# EAGLE board CT_schematic (EAGLE 7.6.0)

Size 100 x 80 mm. Coordinates in mm from the lower left corner, seen from the top.
Outline: 0,0 100,0 100,80 0,80 0,0
Copper layers (1*16): Top 0.035mm / dielectric 1.5mm / Bottom 0.035mm
Design rules "default": minimum track width 10mil, minimum drill 24mil, track to track 8mil, track to pad 8mil, pad to pad 8mil, via to via 8mil, smd to smd 8mil, copper to edge 40mil, drill to drill 8mil, minimum pad ring 10mil, minimum via ring 8mil, stop-mask expansion 4mil, vias tented up to drill 0mil, thermal gap 10mil

## Footprints (pad centres in the part's own frame; a part is rotated, then mirrored left to right if it is on the bottom)
C0603 = smd 0.8 x 0.8: 1 -0.762,0; 2 0.762,0
C0402 = smd 0.5 x 0.5: 1 -0.508,0; 2 0.508,0
C0805 = smd 1.2 x 1.3: 1 -1.016,0; 2 1.016,0
C1210 = smd 1.2 x 2.5: 1 -1.524,0; 2 1.524,0
EXV-9H = smd 3.505 x 1.676: 1 -2.857,0; 2 2.857,0
L0603 = smd 0.8 x 0.8: 1 -0.762,0; 2 0.762,0
PJ-037B_PACKAGE = drill 3.7 square: 1 12,0 | drill 3.2 square: 2 6,0
R0603 = smd 0.8 x 0.8: 1 -0.762,0; 2 0.762,0
WLCSP180 = smd 0.225 x 0.225: A1 -2.4,2.6; A2 -2,2.6; A3 -1.6,2.6; A4 -1.2,2.6; A5 -0.8,2.6; A6 -0.4,2.6; A7 0,2.6; A8 0.4,2.6; A9 0.8,2.6; A10 1.2,2.6; A11 1.6,2.6; A12 2,2.6; A13 2.4,2.6; B1 -2.4,2.2; B2 -2,2.2; B3 -1.6,2.2; B4 -1.2,2.2; B5 -0.8,2.2; B6 -0.4,2.2; B7 0,2.2; B8 0.4,2.2; B9 0.8,2.2; B10 1.2,2.2; B11 1.6,2.2; B12 2,2.2; B13 2.4,2.2; C1 -2.4,1.8; C2 -2,1.8; C3 -1.6,1.8; C4 -1.2,1.8; C5 -0.8,1.8; C6 -0.4,1.8; C7 0,1.8; C8 0.4,1.8; C9 0.8,1.8; C10 1.2,1.8; C11 1.6,1.8; C12 2,1.8; C13 2.4,1.8; D1 -2.4,1.4; D2 -2,1.4; D3 -1.6,1.4; D4 -1.2,1.4; D5 -0.8,1.4; D6 -0.4,1.4; D7 0,1.4; D8 0.4,1.4; D9 0.8,1.4; D10 1.2,1.4; D11 1.6,1.4; D12 2,1.4; D13 2.4,1.4; E1 -2.4,1; E2 -2,1; E3 -1.6,1; E4 -1.2,1; E5 -0.8,1; E6 -0.4,1; E7 0,1; E8 0.4,1; E9 0.8,1; E10 1.2,1; E11 1.6,1; E12 2,1; E13 2.4,1; F1 -2.4,0.6; F2 -2,0.6; F3 -1.6,0.6; F4 -1.2,0.6; F5 -0.8,0.6; F6 -0.4,0.6; F7 0,0.6; F8 0.4,0.6; F9 0.8,0.6; F10 1.2,0.6; F11 1.6,0.6; F12 2,0.6; F13 2.4,0.6; G1 -2.4,0.2; G2 -2,0.2; G3 -1.6,0.2; G4 -1.2,0.2; G5 -0.8,0.2; G6 -0.4,0.2; G8 0.4,0.2; G9 0.8,0.2; G10 1.2,0.2; G11 1.6,0.2; G12 2,0.2; G13 2.4,0.2; H1 -2.4,-0.2; H2 -2,-0.2; H3 -1.6,-0.2; H4 -1.2,-0.2; H5 -0.8,-0.2; H6 -0.4,-0.2; H8 0.4,-0.2; H9 0.8,-0.2; H10 1.2,-0.2; H11 1.6,-0.2; H12 2,-0.2; H13 2.4,-0.2; J1 -2.4,-0.6; J2 -2,-0.6; J3 -1.6,-0.6; J4 -1.2,-0.6; J5 -0.8,-0.6; J6 -0.4,-0.6; J7 0,-0.6; J8 0.4,-0.6; J9 0.8,-0.6; J10 1.2,-0.6; J11 1.6,-0.6; J12 2,-0.6; J13 2.4,-0.6; K1 -2.4,-1; K2 -2,-1; K3 -1.6,-1; K4 -1.2,-1; K5 -0.8,-1; K6 -0.4,-1; K7 0,-1; K8 0.4,-1; K9 0.8,-1; K10 1.2,-1; K11 1.6,-1; K12 2,-1; K13 2.4,-1; L1 -2.4,-1.4; L2 -2,-1.4; L3 -1.6,-1.4; L4 -1.2,-1.4; L5 -0.8,-1.4; L6 -0.4,-1.4; L7 0,-1.4; L8 0.4,-1.4; L9 0.8,-1.4; L10 1.2,-1.4; L11 1.6,-1.4; L12 2,-1.4; L13 2.4,-1.4; M1 -2.4,-1.8; M2 -2,-1.8; M3 -1.6,-1.8; M4 -1.2,-1.8; M5 -0.8,-1.8; M6 -0.4,-1.8; M7 0,-1.8; M8 0.4,-1.8; M9 0.8,-1.8; M10 1.2,-1.8; M11 1.6,-1.8; M12 2,-1.8; M13 2.4,-1.8; N1 -2.4,-2.2; N2 -2,-2.2; N3 -1.6,-2.2; N4 -1.2,-2.2; N5 -0.8,-2.2; N6 -0.4,-2.2; N7 0,-2.2; N8 0.4,-2.2; N9 0.8,-2.2; N10 1.2,-2.2; N11 1.6,-2.2; N12 2,-2.2; N13 2.4,-2.2; P1 -2.4,-2.6; P2 -2,-2.6; P3 -1.6,-2.6; P4 -1.2,-2.6; P5 -0.8,-2.6; P6 -0.4,-2.6; P7 0,-2.6; P8 0.4,-2.6; P9 0.8,-2.6; P10 1.2,-2.6; P11 1.6,-2.6; P12 2,-2.6; P13 2.4,-2.6
SOIC-8 = smd 1.6 x 0.6: 1 -2.7,1.905 | smd 1.55 x 0.6: 2 -2.7,0.635; 3 -2.7,-0.635; 4 -2.7,-1.905; 5 2.7,-1.905; 6 2.7,-0.635; 7 2.7,0.635; 8 2.7,1.905
MOLEX_47219-2001 = smd 0.8 x 1.5: 1 3.2,-2.1; 2 2.1,-2.1; 3 1,-2.1; 4 -0.1,-2.1; 5 -1.2,-2.1; 6 -2.3,-2.1; 7 -3.4,-2.1; 8 -4.5,-2.1 | smd 1.5 x 2.05: G1 6.875,-4.7; G2 6.875,3.6; G3 -6.875,3.6; G4 -6.875,-4.7
LBGA-64 = smd 0.559 x 0.559: A1 -3.5,3.5; A2 -2.5,3.5; A3 -1.5,3.5; A4 -0.5,3.5; A5 0.5,3.5; A6 1.5,3.5; A7 2.5,3.5; A8 3.5,3.5; B1 -3.5,2.5; B2 -2.5,2.5; B3 -1.5,2.5; B4 -0.5,2.5; B5 0.5,2.5; B6 1.5,2.5; B7 2.5,2.5; B8 3.5,2.5; C1 -3.5,1.5; C2 -2.5,1.5; C3 -1.5,1.5; C4 -0.5,1.5; C5 0.5,1.5; C6 1.5,1.5; C7 2.5,1.5; C8 3.5,1.5; D1 -3.5,0.5; D2 -2.5,0.5; D3 -1.5,0.5; D4 -0.5,0.5; D5 0.5,0.5; D6 1.5,0.5; D7 2.5,0.5; D8 3.5,0.5; E1 -3.5,-0.5; E2 -2.5,-0.5; E3 -1.5,-0.5; E4 -0.5,-0.5; E5 0.5,-0.5; E6 1.5,-0.5; E7 2.5,-0.5; E8 3.5,-0.5; F1 -3.5,-1.5; F2 -2.5,-1.5; F3 -1.5,-1.5; F4 -0.5,-1.5; F5 0.5,-1.5; F6 1.5,-1.5; F7 2.5,-1.5; F8 3.5,-1.5; G1 -3.5,-2.5; G2 -2.5,-2.5; G3 -1.5,-2.5; G4 -0.5,-2.5; G5 0.5,-2.5; G6 1.5,-2.5; G7 2.5,-2.5; G8 3.5,-2.5; H1 -3.5,-3.5; H2 -2.5,-3.5; H3 -1.5,-3.5; H4 -0.5,-3.5; H5 0.5,-3.5; H6 1.5,-3.5; H7 2.5,-3.5; H8 3.5,-3.5
DFN-6 = smd 0.805 x 0.3: 1 -0.952,0.5; 2 -0.952,0; 3 -0.952,-0.5; 4 0.952,-0.5; 5 0.952,0; 6 0.952,0.5 | smd 0.61 x 1.42: 7 0,0
FCI_10118193-0001LF = smd 0.4 x 1.35: 1 -1.3,2.675; 2 -0.65,2.675; 3 0,2.675; 4 0.65,2.675; 5 1.3,2.675 | smd 1.6 x 1.4: 6 -3.2,2.45; 7 3.2,2.45 | smd 1.9 x 1.9: 8 -1.2,0; 9 1.2,0 | hole 0.5: -3.3,0; 3.3,0
SOT143B = smd 1 x 0.7: 1 -0.75,-1 | smd 0.6 x 0.7: 2 0.95,-1; 3 0.95,1; 4 -0.95,1
ABS07-32.768KHZ-7-T = smd 1.1 x 2.4: 1 -2.5,0; 2 0,0
ABLS-25.000MHZ-B2F-T = smd 5.6 x 2.8: 1 -3.81,0; 2 5.69,0
WSON-8 = smd 0.3 x 0.6: 1 -0.75,0; 2 0.05,0; 3 0.85,0; 4 1.65,0; 5 1.65,3.8; 6 0.85,3.8; 7 0.05,3.8; 8 -0.75,3.8 | smd 3 x 2.6: PAD 0.45,1.9
SON-6 = smd 0.55 x 0.3: 1 -0.355,0.5 | smd 0.52 x 0.3: 2 -0.37,0; 3 -0.37,-0.5; 4 0.37,-0.5; 5 0.37,0; 6 0.37,0.5
SW_4-1437565-2 = smd 1.4 x 2.1: 1 -2.23,4.55; 2 -2.23,-4.55; 3 2.23,4.55; 4 2.23,-4.55
LGM67K-G1J2-24-Z = smd 0.8 x 1.4: A -2,0; C 0,0
NC7SZ125M5X = smd 1.3 x 0.7: 1 -1.3,0.95; 2 -1.3,0; 3 -1.3,-0.95; 4 1.3,-0.95; 5 1.3,0.95
DUMMY_PACKAGE_192 = drill 0.3: 1 0,-1; 2 1.5,-1

## Placement (x,y rotation side)
C1  1e-06  [C0603]  -40.64,59.69 0 top  (outside the outline)
C2  1e-07  [C0603]  -44.45,59.69 0 top  (outside the outline)
C3  1e-07  [C0603]  -48.26,59.69 0 top  (outside the outline)
C4  1e-07  [C0603]  -52.07,59.69 0 top  (outside the outline)
C5  1e-07  [C0603]  -55.88,59.69 0 top  (outside the outline)
C6  1e-07  [C0603]  -59.69,59.69 0 top  (outside the outline)
C7  1e-07  [C0603]  -63.5,59.69 0 top  (outside the outline)
C8  1e-07  [C0603]  -67.31,59.69 0 top  (outside the outline)
C9  1e-07  [C0603]  -15.24,64.77 0 top  (outside the outline)
C10  4.7e-06  [C0603]  -29.21,59.69 0 top  (outside the outline)
C11  1e-07  [C0603]  -19.05,64.77 0 top  (outside the outline)
C12  1e-08  [C0603]  -22.86,64.77 0 top  (outside the outline)
C13  1e-06  [C0603]  -26.67,64.77 0 top  (outside the outline)
C14  1e-07  [C0603]  -30.48,64.77 0 top  (outside the outline)
C15  2.2e-06  [C0603]  -33.02,59.69 0 top  (outside the outline)
C16  2.2e-06  [C0603]  -36.83,59.69 0 top  (outside the outline)
C17  1e-11  [C0402]  -15.24,69.85 0 top  (outside the outline)
C18  1e-11  [C0402]  -19.05,69.85 0 top  (outside the outline)
C19  1e-11  [C0402]  -22.86,69.85 0 top  (outside the outline)
C20  1e-11  [C0402]  -26.67,69.85 0 top  (outside the outline)
C21  1e-06  [C0603]  -34.29,64.77 0 top  (outside the outline)
C22  1e-08  [C0402]  -30.48,69.85 0 top  (outside the outline)
C23  1e-07  [C0402]  -34.29,69.85 0 top  (outside the outline)
C24  1e-05  [C0805]  -34.29,48.26 0 top  (outside the outline)
C25  1e-08  [C0402]  -38.1,69.85 0 top  (outside the outline)
C26  1e-08  [C0402]  -41.91,69.85 0 top  (outside the outline)
C27  1e-07  [C0402]  -45.72,69.85 0 top  (outside the outline)
C28  1e-08  [C0402]  -49.53,69.85 0 top  (outside the outline)
C29  1e-05  [C1210]  -69.85,41.91 0 top  (outside the outline)
C30  1e-05  [C1210]  -16.51,48.26 0 top  (outside the outline)
C31  1e-07  [C0402]  -53.34,69.85 0 top  (outside the outline)
C32  0.0001  [EXV-9H]  -48.26,33.02 0 top  (outside the outline)
C33  0.0001  [EXV-9H]  -59.69,33.02 0 top  (outside the outline)
C34  1e-08  [C0402]  -57.15,69.85 0 top  (outside the outline)
C35  1e-08  [C0402]  -60.96,69.85 0 top  (outside the outline)
F1  240.0  [L0603]  -38.1,64.77 0 top  (outside the outline)
J1  PJ-037B  [PJ-037B_PACKAGE]  -62.23,7.62 0 top  (outside the outline)
R2  1000.0  [R0603]  -41.91,64.77 0 top  (outside the outline)
R4  4700.0  [R0603]  -45.72,64.77 0 top  (outside the outline)
R5  4700.0  [R0603]  -49.53,64.77 0 top  (outside the outline)
R6  2200.0  [R0603]  -53.34,64.77 0 top  (outside the outline)
R7  2200.0  [R0603]  -57.15,64.77 0 top  (outside the outline)
R8  10000.0  [R0603]  -25.4,54.61 0 top  (outside the outline)
R9  10000.0  [R0603]  -30.48,54.61 0 top  (outside the outline)
R10  10000.0  [R0603]  -35.56,54.61 0 top  (outside the outline)
R11  10000.0  [R0603]  -40.64,54.61 0 top  (outside the outline)
R12  10000.0  [R0603]  -45.72,54.61 0 top  (outside the outline)
R13  100000.0  [R0603]  -39.37,48.26 0 top  (outside the outline)
R14  100000.0  [R0603]  -44.45,48.26 0 top  (outside the outline)
R15  100000.0  [R0603]  -49.53,48.26 0 top  (outside the outline)
R16  100000.0  [R0603]  -54.61,48.26 0 top  (outside the outline)
R17  100000.0  [R0603]  -59.69,48.26 0 top  (outside the outline)
R18  100000.0  [R0603]  -64.77,48.26 0 top  (outside the outline)
R19  10000.0  [R0603]  -50.8,54.61 0 top  (outside the outline)
R20  10000.0  [R0603]  -55.88,54.61 0 top  (outside the outline)
R21  10000.0  [R0603]  -60.96,54.61 0 top  (outside the outline)
R22  10000.0  [R0603]  -66.04,54.61 0 top  (outside the outline)
R23  10000.0  [R0603]  -15.24,59.69 0 top  (outside the outline)
R24  100000.0  [R0603]  -69.85,48.26 0 top  (outside the outline)
R25  2231.0  [R0603]  -60.96,64.77 0 top  (outside the outline)
R26  1000.0  [R0603]  -64.77,64.77 0 top  (outside the outline)
R27  10000.0  [R0603]  -20.32,59.69 0 top  (outside the outline)
R28  10000.0  [R0603]  -25.4,59.69 0 top  (outside the outline)
R29  9100.0  [R0603]  -68.58,64.77 0 top  (outside the outline)
R30  680000.0  [R0603]  -15.24,54.61 0 top  (outside the outline)
R31  120000.0  [R0603]  -20.32,54.61 0 top  (outside the outline)
U1  STM32F778AIY6TR  [WLCSP180]  -36.83,20.32 0 top  (outside the outline)
U2  AT25128B-SSHL-T  [SOIC-8]  -53.34,21.59 0 top  (outside the outline)
U3  0472192001  [MOLEX_47219-2001]  -22.86,8.89 0 top  (outside the outline)
U4  mt28ew256aba1HPC-0SIT  [LBGA-64]  -39.37,7.62 0 top  (outside the outline)
U5  SI7006-A20-IM  [DFN-6]  -31.75,73.66 0 top  (outside the outline)
U6  10118193-0001LF  [FCI_10118193-0001LF]  -38.1,33.02 0 top  (outside the outline)
U7  prtr5v0u2ax  [SOT143B]  -24.13,74.93 0 top  (outside the outline)
U8  ABS07-32.768KHZ-7-T  [ABS07-32.768KHZ-7-T]  -49.53,41.91 0 top  (outside the outline)
U9  ABLS-25.000MHZ-B2F-T  [ABLS-25.000MHZ-B2F-T]  -26.67,41.91 0 top  (outside the outline)
U10  LP3878SDX-ADJ/NOPB  [WSON-8]  -30.48,31.75 0 top  (outside the outline)
U11  TPS3895ADRYR  [SON-6]  -34.29,73.66 0 top  (outside the outline)
U12  4-1437565-2  [SW_4-1437565-2]  -27.94,22.86 0 top  (outside the outline)
U13  Q65110A2395  [LGM67K-G1J2-24-Z]  -58.42,41.91 0 top  (outside the outline)
U14  nc7sz125m5x  [NC7SZ125M5X]  -21.59,48.26 0 top  (outside the outline)
U15  nc7sz125m5x  [NC7SZ125M5X]  -27.94,48.26 0 top  (outside the outline)
U16  Dummy  [DUMMY_PACKAGE_192]  -29.21,74.93 0 top  (outside the outline)

## Library data of the parts
C1-C35 F1 J1 R2 R4-R31 U1-U16 = circuit_tree

## Nets
CLK_CRYSTAL_U1_E12: C17.1 U1.E12 U8.1
CLK_CRYSTAL_U1_E13: C18.1 U1.E13 U8.2
CLK_CRYSTAL_U1_K12: C19.1 U1.K12 U9.1
CLK_CRYSTAL_U1_K13: C20.1 U1.K13 U9.2
GND: C1.2 C2.2 C3.2 C4.2 C5.2 C6.2 C7.2 C8.2 C9.2 C10.2 C11.2 C12.2 C13.2 C14.2 C15.2 C16.2 C17.2 C18.2 C19.2 C20.2 C21.2 C22.2 C23.2 C24.2 C25.2 C26.2 C27.2 C28.2 C29.2 C30.2 C31.2 C32.2 C33.2 C34.2 C35.2 J1.2 R2.2 R8.2 R26.2 R29.2 R31.2 U1.A8 U1.A11 U1.B6 U1.C2 U1.E3 U1.F1 U1.F13 U1.H5 U1.J9 U1.J13 U1.M1 U1.M11 U1.N4 U1.N5 U1.P9 U2.4 U3.6 U3.G1 U3.G2 U3.G3 U3.G4 U4.E8 U4.H2 U4.H7 U5.2 U5.7 U6.5 U6.6 U6.7 U6.8 U6.9 U7.1 U10.3 U10.PAD U11.2 U13.C U14.1 U14.3 U15.1 U15.3 U16.1
NET_U1_A10: R8.1 U1.A10
NET_U1_B9: R6.1 U1.B9 U5.6
NET_U1_C1: C16.1 U1.C1
NET_U1_C8: R7.1 U1.C8 U5.1
NET_U1_C10: R9.1 U1.C10
NET_U1_H6: U1.H6
NET_U1_J3: U1.J3
NET_U1_L11: R5.1 U1.L11 U15.4
NET_U1_M12: C12.1 C13.1 F1.1 U1.M12
NET_U1_P5: C15.1 U1.P5
NET_U1_P10: U13.A
NET_U1_P11: U12.3 U12.4
NET_U2_3: R10.1 U2.3
NET_U2_7: R12.1 U2.7
NET_U4_B4: R22.1 U4.B4
NET_U4_B5: R4.1 U4.B5 U14.4
NET_U10_1: C28.1 U10.1
NET_U10_6: R25.2 R26.1 U10.6
NET_U10_8: R24.1 U10.8
NET_U11_1: R28.1 R29.1 U11.1
NET_U11_3: R30.2 R31.1 U11.3
NET_U11_4: R27.1 U11.4 U14.2 U15.2
NET_U12_1: R2.1 U12.1 U12.2
PROC_DAC_OUT1: U1.L9 U16.2
PROC_FMC_A0: U1.G11 U4.E2
PROC_FMC_A1: U1.G12 U4.D2
PROC_FMC_A2: U1.G13 U4.C2
PROC_FMC_A3: U1.H11 U4.A2
PROC_FMC_A4: U1.H12 U4.B2
PROC_FMC_A5: U1.H13 U4.D3
PROC_FMC_A6: U1.K7 U4.C3
PROC_FMC_A7: U1.L8 U4.A3
PROC_FMC_A8: U1.K8 U4.B6
PROC_FMC_A9: U1.P8 U4.A6
PROC_FMC_A10: U1.N8 U4.C6
PROC_FMC_A11: U1.L7 U4.D6
PROC_FMC_A12: U1.H9 U4.B7
PROC_FMC_A13: U1.G9 U4.A7
PROC_FMC_A14: U1.G1 U4.C7
PROC_FMC_A15: U1.G2 U4.D7
PROC_FMC_A16: U1.K3 U4.E7
PROC_FMC_A17: U1.J4 U4.B3
PROC_FMC_A18: U1.L2 U4.C4
PROC_FMC_A19: U1.F10 U4.D5
PROC_FMC_A20: U1.C12 U4.D4
PROC_FMC_A21: U1.D12 U4.C5
PROC_FMC_A22: U1.E11 U4.B8
PROC_FMC_A23: U1.E10 U4.C8
PROC_FMC_D0: U1.L1 U4.E3
PROC_FMC_D1: U1.K2 U4.H3
PROC_FMC_D2: U1.A4 U4.E4
PROC_FMC_D3: U1.D5 U4.H4
PROC_FMC_D4: U1.M7 U4.H5
PROC_FMC_D5: U1.N7 U4.E5
PROC_FMC_D6: U1.P7 U4.H6
PROC_FMC_D7: U1.J6 U4.E6
PROC_FMC_D8: U1.K6 U4.F3
PROC_FMC_D9: U1.L6 U4.G3
PROC_FMC_D10: U1.P6 U4.F4
PROC_FMC_D11: U1.N6 U4.G4
PROC_FMC_D12: U1.M6 U4.F5
PROC_FMC_D13: U1.M3 U4.G6
PROC_FMC_D14: U1.L3 U4.F6
PROC_FMC_D15: U1.M2 U4.G7
PROC_FMC_NBL0: R23.1 U1.C9 U4.F7
PROC_FMC_NE2: R19.1 U1.D7 U4.F2
PROC_FMC_NOE: R20.1 U1.A5 U4.G2
PROC_FMC_NWAIT: U1.E6 U4.A4
PROC_FMC_NWE: R21.1 U1.C5 U4.A5
PROC_SDMMC1_CK: R14.1 U1.D4 U3.5
PROC_SDMMC1_CMD: R13.1 U1.D6 U3.3
PROC_SDMMC1_D0: R15.1 U1.G8 U3.7
PROC_SDMMC1_D1: R16.1 U1.E1 U3.8
PROC_SDMMC1_D2: R17.1 U1.B4 U3.1
PROC_SDMMC1_D3: R18.1 U1.C4 U3.2
PROC_SPI1_MISO: U1.C6 U2.2
PROC_SPI1_MOSI: U1.A9 U2.5
PROC_SPI1_NSS: R11.1 U1.A7 U2.1
PROC_SPI1_SCK: U1.B7 U2.6
PROC_USB_OTG_FS_DM: U1.E3 U6.2 U7.3
PROC_USB_OTG_FS_DP: U1.D1 U6.3 U7.2
PROC_USB_OTG_FS_VBUS: C21.1 U1.F4 U6.1 U7.4
VCC_S1_11V4: C29.1 C32.1 C33.1 J1.1 R24.2 U10.4
VCC_TIER1_3V3: C1.1 C2.1 C3.1 C4.1 C5.1 C6.1 C7.1 C8.1 C9.1 C10.1 C11.1 C14.1 C22.1 C23.1 C24.1 C25.1 C26.1 C27.1 C30.1 C31.1 C34.1 C35.1 F1.2 R4.2 R5.2 R6.2 R7.2 R9.2 R10.2 R11.2 R12.2 R13.2 R14.2 R15.2 R16.2 R17.2 R18.2 R19.2 R20.2 R21.2 R22.2 R23.2 R25.1 R27.2 R28.2 R30.1 U1.A6 U1.B2 U1.B8 U1.B11 U1.C13 U1.F2 U1.F12 U1.J12 U1.K1 U1.K9 U1.M8 U1.P4 U2.8 U3.4 U4.D8 U4.F1 U4.G5 U5.5 U10.5 U11.6 U14.5 U15.5

## Tracks (layer width: path | path; a pad name or v marks a point on that pad's centre or on a via)
CLK_CRYSTAL_U1_E12  (2 unrouted)
CLK_CRYSTAL_U1_E13  (2 unrouted)
CLK_CRYSTAL_U1_K12  (2 unrouted)
CLK_CRYSTAL_U1_K13  (2 unrouted)
GND  (81 unrouted)
NET_U1_A10  (1 unrouted)
NET_U1_B9  (2 unrouted)
NET_U1_C1  (1 unrouted)
NET_U1_C8  (2 unrouted)
NET_U1_C10  (1 unrouted)
NET_U1_L11  (2 unrouted)
NET_U1_M12  (3 unrouted)
NET_U1_P5  (1 unrouted)
NET_U1_P11  (1 unrouted)
NET_U2_3  (1 unrouted)
NET_U2_7  (1 unrouted)
NET_U4_B4  (1 unrouted)
NET_U4_B5  (2 unrouted)
NET_U10_1  (1 unrouted)
NET_U10_6  (2 unrouted)
NET_U10_8  (1 unrouted)
NET_U11_1  (2 unrouted)
NET_U11_3  (2 unrouted)
NET_U11_4  (3 unrouted)
NET_U12_1  (2 unrouted)
PROC_DAC_OUT1  (1 unrouted)
PROC_FMC_A0  (1 unrouted)
PROC_FMC_A1  (1 unrouted)
PROC_FMC_A2  (1 unrouted)
PROC_FMC_A3  (1 unrouted)
PROC_FMC_A4  (1 unrouted)
PROC_FMC_A5  (1 unrouted)
PROC_FMC_A6  (1 unrouted)
PROC_FMC_A7  (1 unrouted)
PROC_FMC_A8  (1 unrouted)
PROC_FMC_A9  (1 unrouted)
PROC_FMC_A10  (1 unrouted)
PROC_FMC_A11  (1 unrouted)
PROC_FMC_A12  (1 unrouted)
PROC_FMC_A13  (1 unrouted)
PROC_FMC_A14  (1 unrouted)
PROC_FMC_A15  (1 unrouted)
PROC_FMC_A16  (1 unrouted)
PROC_FMC_A17  (1 unrouted)
PROC_FMC_A18  (1 unrouted)
PROC_FMC_A19  (1 unrouted)
PROC_FMC_A20  (1 unrouted)
PROC_FMC_A21  (1 unrouted)
PROC_FMC_A22  (1 unrouted)
PROC_FMC_A23  (1 unrouted)
PROC_FMC_D0  (1 unrouted)
PROC_FMC_D1  (1 unrouted)
PROC_FMC_D2  (1 unrouted)
PROC_FMC_D3  (1 unrouted)
PROC_FMC_D4  (1 unrouted)
PROC_FMC_D5  (1 unrouted)
PROC_FMC_D6  (1 unrouted)
PROC_FMC_D7  (1 unrouted)
PROC_FMC_D8  (1 unrouted)
PROC_FMC_D9  (1 unrouted)
PROC_FMC_D10  (1 unrouted)
PROC_FMC_D11  (1 unrouted)
PROC_FMC_D12  (1 unrouted)
PROC_FMC_D13  (1 unrouted)
PROC_FMC_D14  (1 unrouted)
PROC_FMC_D15  (1 unrouted)
PROC_FMC_NBL0  (2 unrouted)
PROC_FMC_NE2  (2 unrouted)
PROC_FMC_NOE  (2 unrouted)
PROC_FMC_NWAIT  (1 unrouted)
PROC_FMC_NWE  (2 unrouted)
PROC_SDMMC1_CK  (2 unrouted)
PROC_SDMMC1_CMD  (2 unrouted)
PROC_SDMMC1_D0  (2 unrouted)
PROC_SDMMC1_D1  (2 unrouted)
PROC_SDMMC1_D2  (2 unrouted)
PROC_SDMMC1_D3  (2 unrouted)
PROC_SPI1_MISO  (1 unrouted)
PROC_SPI1_MOSI  (1 unrouted)
PROC_SPI1_NSS  (2 unrouted)
PROC_SPI1_SCK  (1 unrouted)
PROC_USB_OTG_FS_DM  (2 unrouted)
PROC_USB_OTG_FS_DP  (2 unrouted)
PROC_USB_OTG_FS_VBUS  (3 unrouted)
VCC_S1_11V4  (5 unrouted)
VCC_TIER1_3V3  (67 unrouted)